# Altium PCB PCB1.PcbDoc (part 1 of 3)
Units mm, origin at the board's own origin, x right, y up, seen from the top; angles counter-clockwise.
Board outline 238 x 185 mm, 2 copper layers (Top Layer, Bottom Layer); 253 components, 247 nets, 920 pads, 36 vias.
Unrouted connection lines stored in the file: 56.
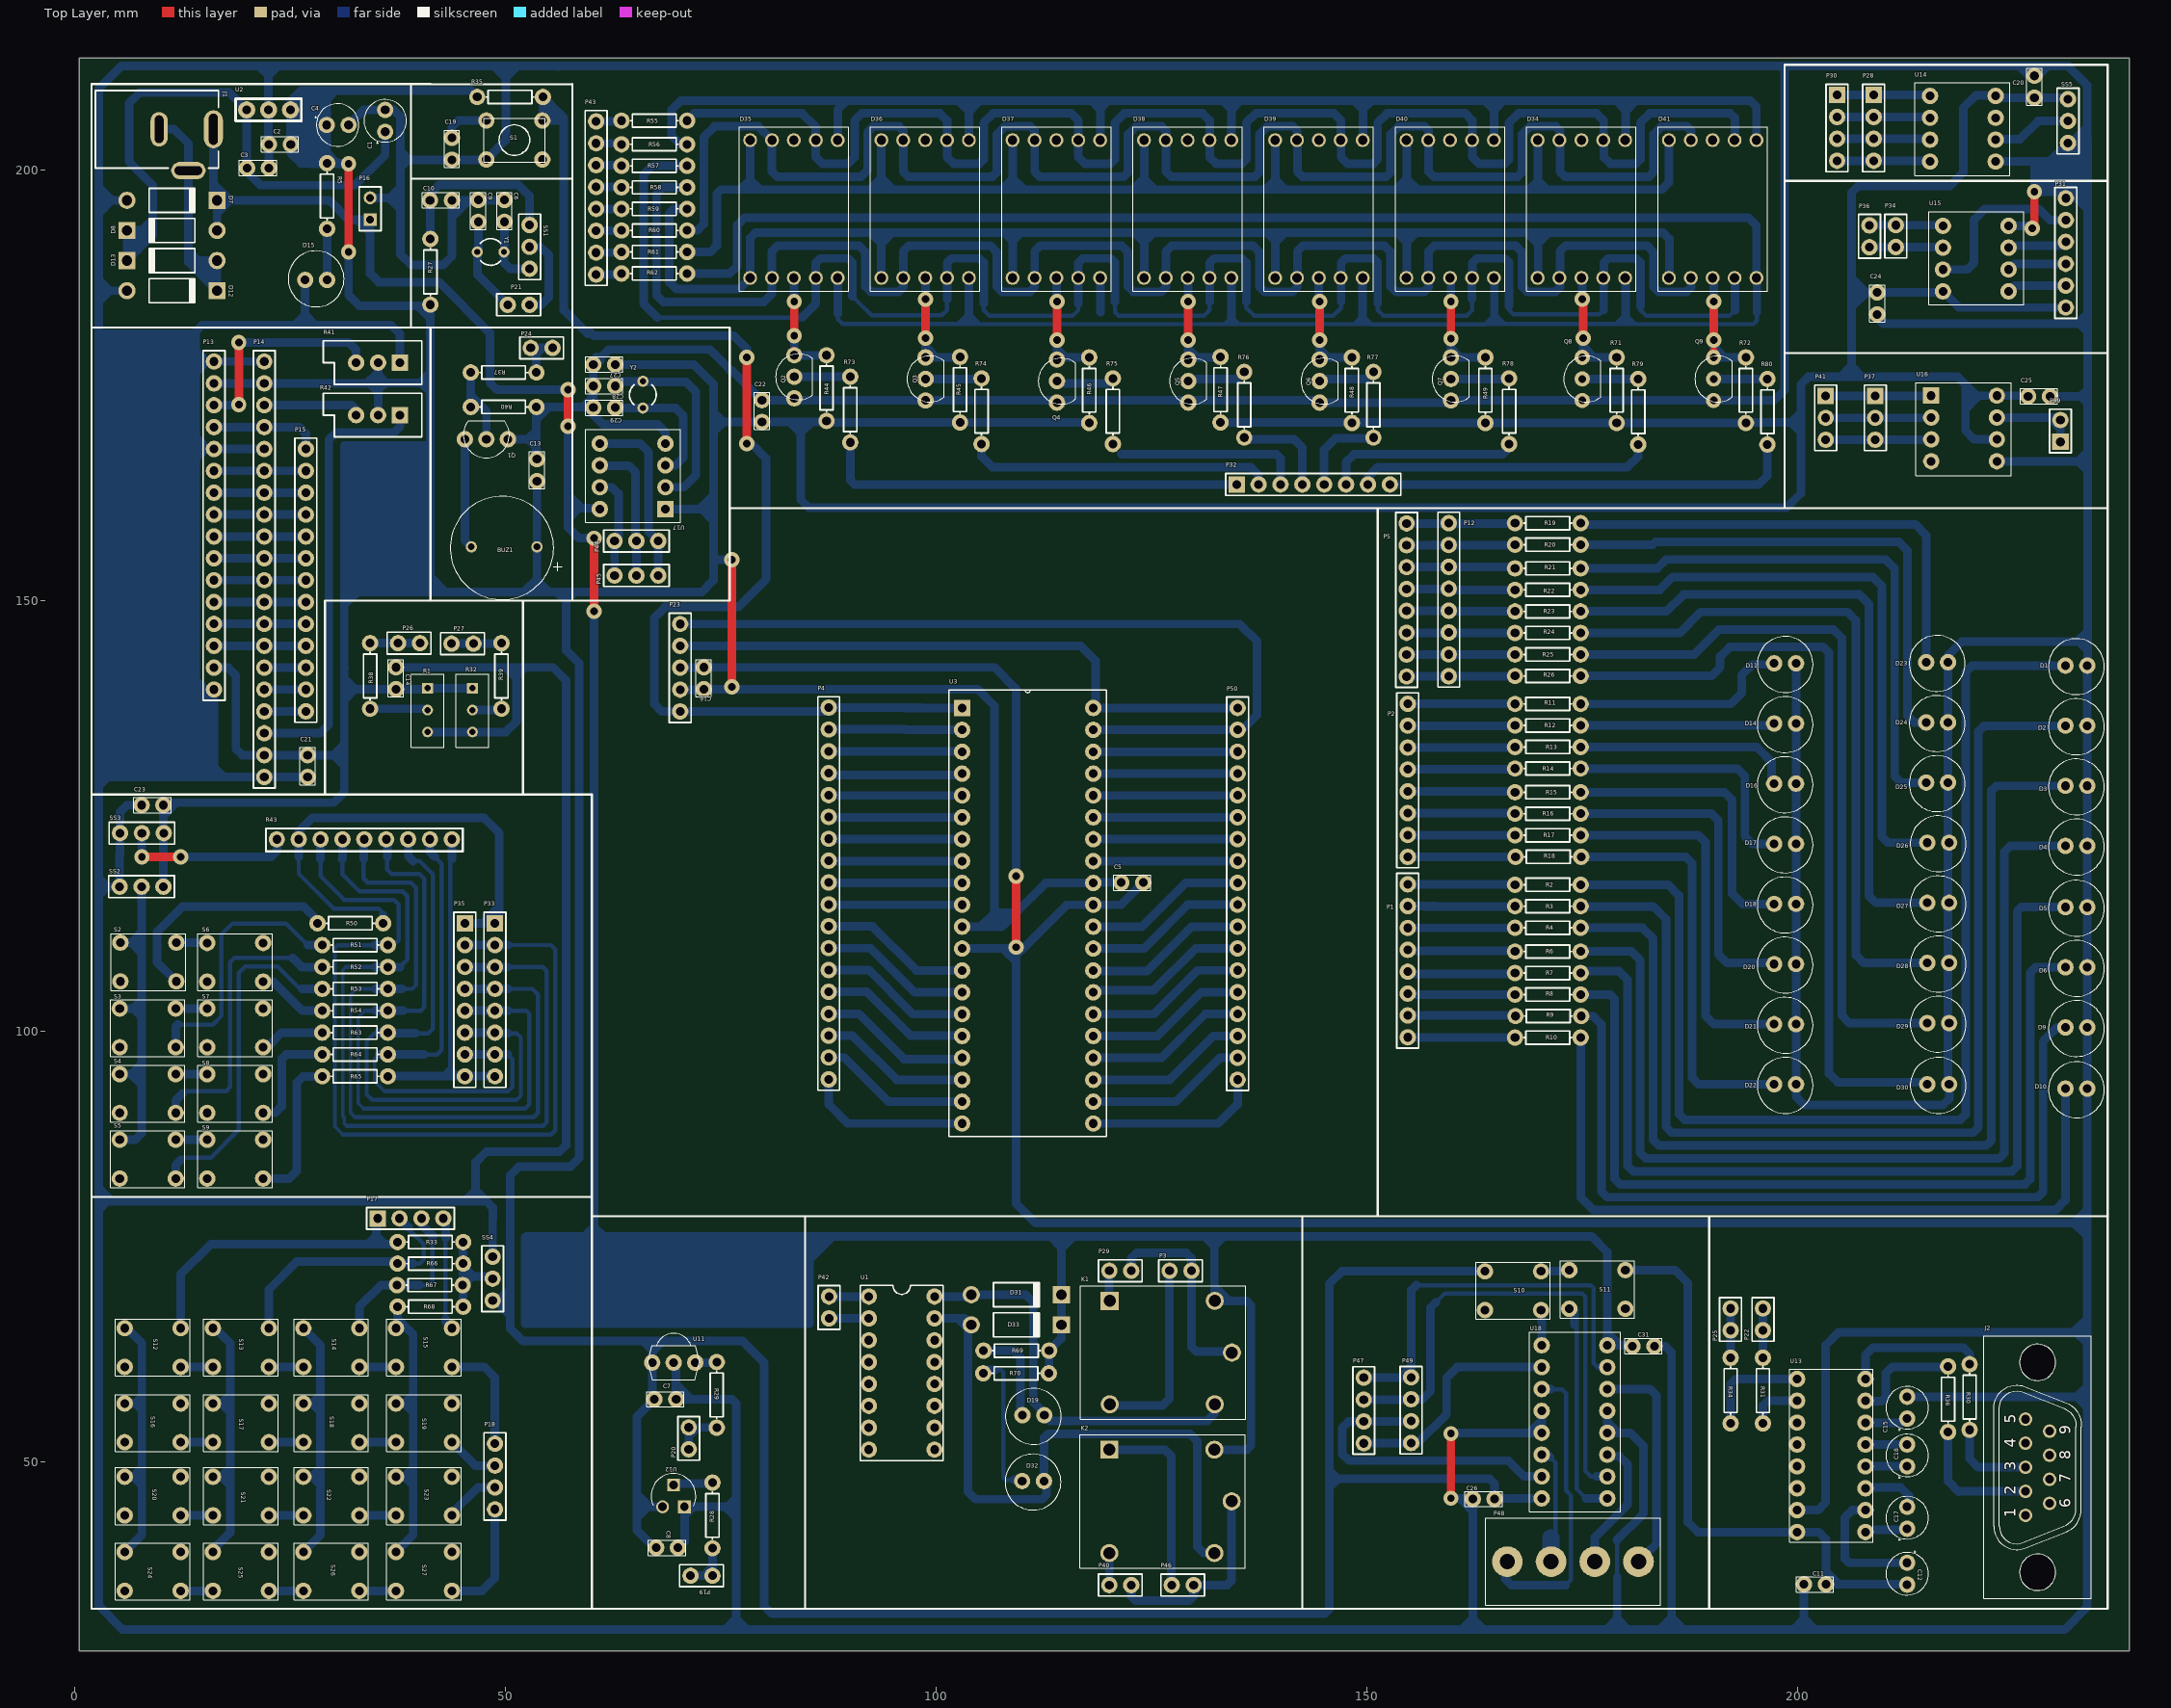
[diagram p0: Top Layer view]
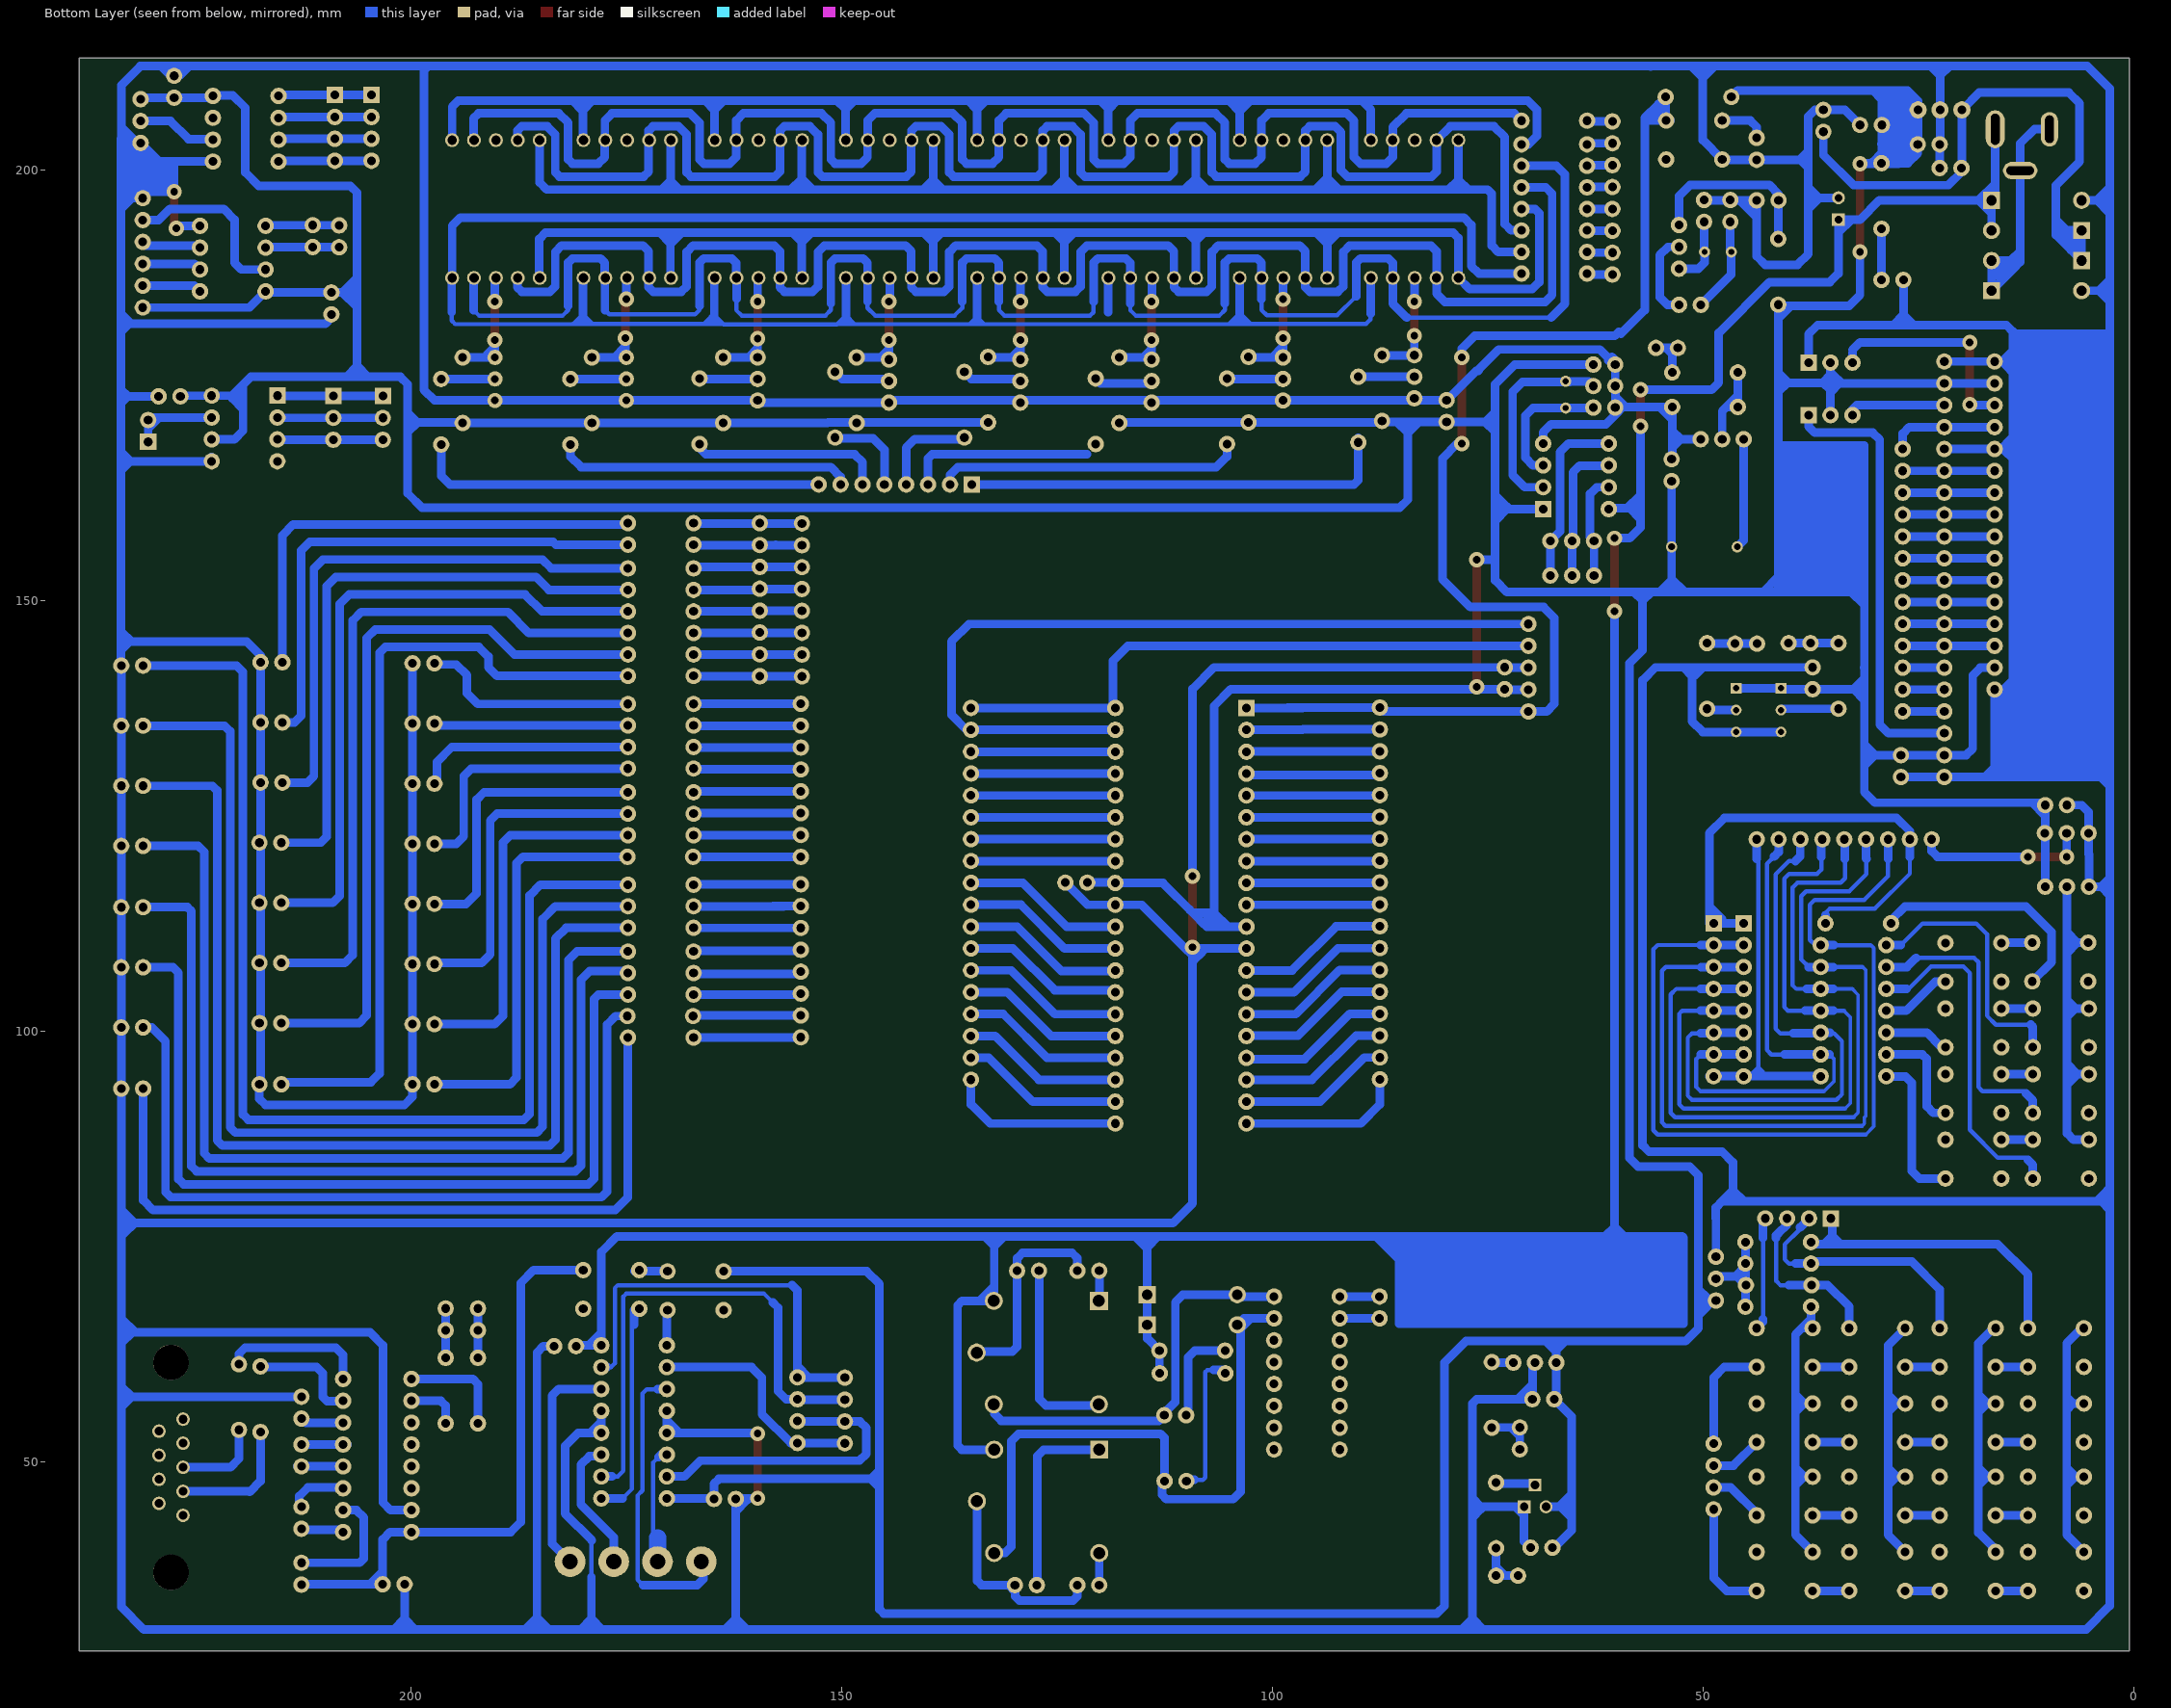
[diagram p1: Bottom Layer view, seen from below]

## Layer stack, top to bottom
Top Solder: solder mask 0.0102, Solder Resist, Dk 3.5
Top Layer: signal copper 0.0356
Dielectric 1: dielectric 0.32, FR-4, Dk 4.8
Bottom Layer: signal copper 0.0356
Bottom Solder: solder mask 0.0102, Solder Resist, Dk 3.5

## Board outline
0.5,28 238.5,28 238.5,213 0.5,213

## Design rules (kind name [scope] priority, off if disabled: settings)
Clearance [All] p1: gap=0.5 ignorepadtopadclearanceinfootprint=FALSE except(0.3: Arc-THPad Track-THPad)
PolygonConnect [All] p1: connectstyle=Relief reliefconductorwidth=0.254 reliefentries=4 polygonreliefangle="90 Angle" airgapwidth=0.254
RoutingVias [All] p1: holewidth=0.711 width=1.27 viastyle="Through Hole" minholewidth=0.711 minwidth=1.27 maxholewidth=0.711 maxwidth=1.27
SolderMaskExpansion [All] p1: expansion=0.102
Width [All] p1: maxlimit=2 minlimit=0.254 preferedwidth=1
30 further rules are at their usual default settings.

## Classes and differential pairs
component class Sheet1: BUZ1 C1 C2 C3 C4 C5 C6 C7 C8 C9 C10 C11 C12 C13 C14 C15 C16 C17 C18 C19 D1 D2 D3 D4 D5 D6 D7 D8 D9 D10 D11 D12 D13 D14 D15 D16 D17 D18 D19 D20 D21 D22 D23 D24 D25 D26 D27 D28 D29 D30 D31 D32 D33 J1 J2 K1 K2 P1 P2 P3 P4 P5 P12 P16 P19 P20 P21 P22 P23 P24 P25 P26 P27 P29 P40 P42 P46 P50 Q1 R1 R2 R3 R4 R5 R6 R7 R8 R9 R10 R11 R12 R13 R14 R15 R16 R17 R18 R19 R20 R21 R22 R23 R24 R25 R26 R27 R28 R29 R30 R31 R32 R34 R35 R36 R37 R38 R39 R40 R69 R70 S1 SS1 U1 U2 U3 U11 U12 U13 Y1
component class Sheet2: C20 C21 C22 C23 C24 C25 C26 C27 C28 C29 C31 D34 D35 D36 D37 D38 D39 D40 D41 P13 P14 P15 P17 P18 P28 P30 P31 P32 P33 P34 P35 P36 P37 P39 P41 P43 P44 P45 P47 P48 P49 Q2 Q4 Q5 Q6 Q7 Q8 Q9 R33 R41 R42 R43 R44 R45 R46 R47 R48 R49 R50 R51 R52 R53 R54 R55 R56 R57 R58 R59 R60 R61 R62 R63 R64 R65 R66 R67 R68 R71 R72 R73 R74 R75 R76 R77 R78 R79 R80 S2 S3 S4 S5 S6 S7 S8 S9 S10 S11 S12 S13 S14 S15 S16 S17 S18 S19 S20 S21 S22 S23 S24 S25 S26 S27 S? SS2 SS3 SS4 SS5 U14 U15 U16 U18 Y2

## Components (designator, comment, footprint, x,y, rotation, side; value= is the part's Value field where it differs from the comment)
BUZ1 "CEM-1203(42)" CUI_CEM-1203(42) 53.625,156.25 r180 top
C1 "P.CAP" polarityCAP 36,204.46 r90 top value=47U
C2 "cap" cap 22.5,203 r0 top value=104p
C3 "cap" cap 22.5,200.25 r180 top value=104p
C4 "P.CAP" polarityCAP 29.21,205.25 r0 top value=47U
C5 "cap" cap 124.016,117.25 r180 top value=104p
C6 "cap" cap 49.853,194 r90 top value=22p
C7 "cap" cap 69.79,57.25 r180 top value=104p
C8 "cap" cap 67.46,40 r0 top value=104p
C9 "cap" cap 46.805,194 r90 top value=22p
C10 "cap" cap 43.75,196.5 r180 top value=22p
C11 "cap" cap 200.75,35.75 r0 top value=104p
C12 "P.CAP" polarityCAP 212.727,38.25 r270 top value=10U
C13 "cap" cap 53.625,166.425 r270 top value=104p
C14 "cap" cap 37.25,142.25 r270 top value=104p
C15 "P.CAP" polarityCAP 212.727,55 r90 top value=10U
C16 "cap" cap 73,142.25 r270 top value=104p
C17 "P.CAP" polarityCAP 212.727,42.21 r90 top value=10U
C18 "P.CAP" polarityCAP 212.727,49.445 r90 top value=10U
C19 "cap" cap 43.75,201.21 r90 top value=0.1u
C20 "cap" cap 227.5,210.955 r270 top value=104p
C21 "cap" cap 27,129.516 r90 top value=104p
C22 "cap" cap 79.75,173.29 r270 top value=104p
C23 "cap" cap 7.71,126.25 r0 top value=104p
C24 "cap" cap 209.25,183.25 r90 top value=104p
C25 "cap" cap 229.312,173.728 r180 top value=104p
C26 "cap" cap 164.826,45.665 r180 top value=104p
C27 "cap" cap 60.173,177.423 r0 top value=104p
C28 "cap" cap 62.713,174.923 r180 top value=22p
C29 "cap" cap 62.713,172.423 r180 top value=22p
C31 "cap" cap 183.374,63.415 r180 top value=104p
D1 "LED" PCBComponent_1 231.107,142.463 r0 top
D2 "LED" PCBComponent_1 231.107,135.478 r0 top
D3 "LED" PCBComponent_1 231.107,128.493 r0 top
D4 "LED" PCBComponent_1 231.107,121.508 r0 top
D5 "LED" PCBComponent_1 231.107,114.396 r0 top
D6 "LED" PCBComponent_1 231.107,107.411 r0 top
D7 "1N4007" DO-41 11.25,196.5 r0 top
D8 "1N4007" DO-41 11.25,193 r180 top
D9 "LED" PCBComponent_1 231.107,100.426 r0 top
D10 "LED" PCBComponent_1 231.107,93.314 r0 top
D11 "LED" PCBComponent_1 197.281,142.717 r0 top
D12 "1N4007" DO-41 11.25,186 r0 top
D13 "1N4007" DO-41 11.25,189.5 r180 top
D14 "LED" PCBComponent_1 197.281,135.732 r0 top
D15 "LED" PCBComponent_1 29.25,187.25 r180 top
D16 "LED" PCBComponent_1 197.281,128.747 r0 top
D17 "LED" PCBComponent_1 197.281,121.762 r0 top
D18 "LED" PCBComponent_1 197.281,114.777 r0 top
D19 "LED" PCBComponent_1 109.996,55.389 r0 top
D20 "LED" PCBComponent_1 197.281,107.792 r0 top
D21 "LED" PCBComponent_1 197.281,100.807 r0 top
D22 "LED" PCBComponent_1 197.281,93.822 r0 top
D23 "LED" PCBComponent_1 214.934,142.844 r0 top
D24 "LED" PCBComponent_1 214.934,135.859 r0 top
D25 "LED" PCBComponent_1 214.934,128.874 r0 top
D26 "LED" PCBComponent_1 215.061,121.889 r0 top
D27 "LED" PCBComponent_1 215.061,114.904 r0 top
D28 "LED" PCBComponent_1 215.061,107.919 r0 top
D29 "LED" PCBComponent_1 215.061,100.934 r0 top
D30 "LED" PCBComponent_1 215.061,93.822 r0 top
D31 "Diode 1N4007" DO-41 109.286,69.389 r0 top
D32 "LED" PCBComponent_1 109.96,47.75 r0 top
D33 "Diode 1N4007" DO-41 109.286,65.889 r0 top
D34 "7seg" LED_LTD-4708G 169.819,187.485 r90 top
D35 "7seg" LED_LTD-4708G 78.379,187.485 r90 top
D36 "7seg" LED_LTD-4708G 93.619,187.485 r90 top
D37 "7seg" LED_LTD-4708G 108.859,187.485 r90 top
D38 "7seg" LED_LTD-4708G 124.099,187.485 r90 top
D39 "7seg" LED_LTD-4708G 139.339,187.485 r90 top
D40 "7seg" LED_LTD-4708G 154.579,187.485 r90 top
D41 "7seg" LED_LTD-4708G 185.062,187.485 r90 top
J1 "Socket" GCT_DCJ235-05-A-XX-X_REVA 9.5,204.75 r270 top
J2 "DB9M" D-09M 227.874,49.338 r90 top
K1 "1-1721150-0" RELAY_ORWH-SH-105D1F,000 126.324,62.665 r0 top
K2 "1-1721150-0" RELAY_ORWH-SH-105D1F,000 126.286,45.389 r0 top
P1 "Header 8" HDR1X8#1 154.736,99.283 r90 top
P2 "Header 8" HDR1X8#1 154.736,120.238 r90 top
P3 "Header 2" HDR1X2#1 127.084,72.165 r0 top
P4 "Header 18" HDR1X18#1 87.5,137.58 r270 top
P5 "Header 8" HDR1X8#1 154.609,141.193 r90 top
P12 "Header 8" HDR1X8#1 159.5,141.22 r90 top
P13 "Header 16" HDR1X16 16.121,177.776 r270 top
P14 "Header 20" HDR1X20 21.963,177.776 r270 top
P15 "Header 13" HDR1X13 26.789,167.616 r270 top
P16 "Header 2" HDR1X2#2 34.25,194.25 r90 top
P17 "Header 4" HDR1X4#1 35.13,78.25 r0 top
P18 "Header 4" HDR1X4#2 48.75,52.08 r270 top
P19 "Header 2" HDR1X2#3 71.46,36.75 r0 top
P20 "Header 2" HDR1X2#1 71.25,51.433 r90 top
P21 "Header 2" HDR1X2#1 52.77,184.364 r180 top
P22 "Header 2" HDR1X2#1 195.977,65.25 r90 top
P23 "Header 5" HDR1X5 70.25,147.29 r270 top
P24 "Header 2" HDR1X2#1 52.897,179.353 r0 top
P25 "Header 2" HDR1X2#1 192.227,65.25 r90 top
P26 "Header 2" HDR1X2#1 37.5,145.06 r0 top
P27 "Header 2" HDR1X2#1 43.71,145 r0 top
P28 "Header 4" HDR1X4#1 208.841,208.719 r270 top
P29 "Header 2" HDR1X2#1 120.084,72.165 r0 top
P30 "Header 4" HDR1X4#1 204.591,208.719 r270 top
P31 "Header 6" HDR1X6 231.147,184.045 r90 top
P32 "Header 8" HDR1X8#2 134.88,163.5 r0 top
P33 "Header 8" HDR1X8#2 48.75,112.53 r270 top
P34 "Header 2" HDR1X2#1 211.409,191.071 r90 top
P35 "Header 8" HDR1X8#2 45.25,112.53 r270 top
P36 "Header 2" HDR1X2#1 208.353,191.045 r90 top
P37 "Header 3" HDR1X3#1 209.022,173.768 r270 top
P39 "Header 2" HDR1X2#4 230.522,168.438 r90 top
P40 "Header 2" HDR1X2#1 120.086,35.665 r0 top
P41 "Header 3" HDR1X3#1 203.272,173.768 r270 top
P42 "Header 2" HDR1X2#1 87.536,69.179 r270 top
P43 "Header 8" HDR1X8#1 60.5,187.88 r90 top
P44 "Header 3" HDR1X3#2 67.713,156.923 r180 top
P45 "Header 3" HDR1X3#2 67.713,152.923 r180 top
P46 "Header 2" HDR1X2#1 127.334,35.665 r0 top
P47 "Header 4" HDR1X4#2 149.624,59.745 r270 top
P48 "screw terminal" "screw library" 166.296,38.389 r0 top
P49 "Header 4" HDR1X4#2 155.124,59.785 r270 top
P50 "Header 18" HDR1X18#2 134.976,137.54 r270 top
Q1 "2N5172" TRANSISTOR_TO-92#1 47.75,168.75 r180 top
Q2 "2N5172" TRANSISTOR_TO-92#1 83.5,176 r90 top
Q3 "2N5172" TRANSISTOR_TO-92#1 98.75,175.75 r90 top
Q4 "2N5172" TRANSISTOR_TO-92#1 114,175.5 r90 top
Q5 "2N5172" TRANSISTOR_TO-92#1 129.25,175.5 r90 top
Q6 "2N5172" TRANSISTOR_TO-92#1 144.5,175.5 r90 top
Q7 "2N5172" TRANSISTOR_TO-92#1 159.75,175.75 r90 top
Q8 "2N5172" TRANSISTOR_TO-92#2 175,175.75 r90 top
Q9 "2N5172" TRANSISTOR_TO-92#2 190.25,175.75 r90 top
R1 "3296W-1-103ALF" TRIM_3296W-1-103ALF 40.925,137.29 r0 top
R2 "Res1" AXIAL-0.3 171,117 r0 top value=470
R3 "Res1" AXIAL-0.3 171,114.5 r0 top value=470
R4 "Res1" AXIAL-0.3 171,112 r0 top value=470
R5 "Res1" AXIAL-0.3 29.25,197 r90 top value=2.2K
R6 "Res1" AXIAL-0.3 171,109.25 r0 top value=470
R7 "Res1" AXIAL-0.3 171,106.75 r0 top value=470
R8 "Res1" AXIAL-0.3 171,104.25 r0 top value=470
R9 "Res1" AXIAL-0.3 171.06,101.75 r0 top value=470
R10 "Res1" AXIAL-0.3 171,99.25 r0 top value=470
R11 "Res1" AXIAL-0.3 171,138 r0 top value=470
R12 "Res1" AXIAL-0.3 171,135.5 r0 top value=470
R13 "Res1" AXIAL-0.3 171,133 r0 top value=470
R14 "Res1" AXIAL-0.3 171,130.5 r0 top value=470
R15 "Res1" AXIAL-0.3 171,127.75 r0 top value=470
R16 "Res1" AXIAL-0.3 171,125.25 r0 top value=470
R17 "Res1" AXIAL-0.3 171,122.75 r0 top value=470
R18 "Res1" AXIAL-0.3 171.06,120.25 r0 top value=470
R19 "Res1" AXIAL-0.3 171,159 r0 top value=470
R20 "Res1" AXIAL-0.3 171,156.5 r0 top value=470
R21 "Res1" AXIAL-0.3 171,153.75 r0 top value=470
R22 "Res1" AXIAL-0.3 171,151.25 r0 top value=470
R23 "Res1" AXIAL-0.3 171,148.75 r0 top value=470
R24 "Res1" AXIAL-0.3 171,146.25 r0 top value=470
R25 "Res1" AXIAL-0.3 171,143.75 r0 top value=470
R26 "Res1" AXIAL-0.3 171,141.25 r0 top value=470
R27 "Res1" AXIAL-0.3 41.25,188.19 r270 top value=4.7K
R28 "Res1" AXIAL-0.3 74,43.75 r90 top value=470
R29 "Res1" AXIAL-0.3 74.5,57.75 r270 top value=470
R30 "Res1" AXIAL-0.3 219.977,57.5 r90 top value=470
R31 "Res1" AXIAL-0.3 195.977,58.25 r270 top value=470
R32 "3296W-1-103ALF" TRIM_3296W-1-103ALF 46.132,137.29 r0 top
R33 "Res1" AXIAL-0.3 41.25,75.5 r0 top value=1K
R34 "Res1" AXIAL-0.3 192.227,58.25 r90 top value=1K
R35 "Res1" AXIAL-0.3 50.5,208.5 r180 top value=10K
R36 "Res1" AXIAL-0.3 217.477,57.25 r270 top value=1K
R37 "Res1" AXIAL-0.3 49.75,176.5 r0 top value=10K
R38 "Res1" AXIAL-0.3 34.25,141.25 r270 top value=4.7K
R39 "Res1" AXIAL-0.3 49.5,141.25 r270 top value=4.7K
R40 "Res1" AXIAL-0.3 49.75,172.5 r180 top value=10K
R41 "RPot" VR5 35.171,177.649 r180 top value=1K
R42 "RPot" VR5 35.171,171.553 r180 top value=10K
R43 "10k sip" "10k sip" 23.42,122.28 r0 top value=10k*8
R44 "Res1" AXIAL-0.3 87.25,174.69 r270 top value=10k
R45 "Res1" AXIAL-0.3 102.75,174.5 r270 top value=10k
R46 "Res1" AXIAL-0.3 117.75,174.44 r270 top value=10k
R47 "Res1" AXIAL-0.3 133,174.5 r270 top value=10k
R48 "Res1" AXIAL-0.3 148.25,174.44 r270 top value=10k
R49 "Res1" AXIAL-0.3 163.75,174.44 r270 top value=10k
R50 "Res1" AXIAL-0.3 31.956,112.53 r0 top value=1K
R51 "Res1" AXIAL-0.3 32.5,109.99 r0 top value=1K
R52 "Res1" AXIAL-0.3 32.5,107.45 r0 top value=1K
R53 "Res1" AXIAL-0.3 32.5,104.91 r0 top value=1K
R54 "Res1" AXIAL-0.3 32.5,102.37 r0 top value=1K
R55 "Res1" AXIAL-0.3 67.25,205.75 r0 top value=470
R56 "Res1" AXIAL-0.3 67.25,203 r0 top value=470
R57 "Res1" AXIAL-0.3 67.25,200.5 r0 top value=470
R58 "Res1" AXIAL-0.3 67.25,198 r0 top value=470
R59 "Res1" AXIAL-0.3 67.25,195.5 r0 top value=470
R60 "Res1" AXIAL-0.3 67.25,193 r0 top value=470
R61 "Res1" AXIAL-0.3 67.25,190.5 r0 top value=470
R62 "Res1" AXIAL-0.3 67.25,188 r0 top value=470
R63 "Res1" AXIAL-0.3 32.5,99.83 r0 top value=1K
R64 "Res1" AXIAL-0.3 32.5,97.29 r0 top value=1K
R65 "Res1" AXIAL-0.3 32.5,94.75 r0 top value=1K
R66 "Res1" AXIAL-0.3 41.25,73 r0 top value=1K
R67 "Res1" AXIAL-0.3 41.19,70.5 r0 top value=1K
R68 "Res1" AXIAL-0.3 41.25,68 r0 top value=1K
R69 "Res1" AXIAL-0.3 109.286,62.889 r180 top value=470K
R70 "Res1" AXIAL-0.3 109.25,60.25 r180 top value=470K
R71 "Res1" AXIAL-0.3 179,174.44 r270 top value=10k
R72 "Res1" AXIAL-0.3 194,174.44 r270 top value=10k
R73 "Res1" AXIAL-0.3 90,172.19 r270 top value=1K
R74 "Res1" AXIAL-0.3 105.25,172 r270 top value=1K
R75 "Res1" AXIAL-0.3 120.5,172 r270 top value=1K
R76 "Res1" AXIAL-0.3 135.75,172.75 r270 top value=1K
R77 "Res1" AXIAL-0.3 150.75,172.75 r270 top value=1K
R78 "Res1" AXIAL-0.3 166.5,172 r270 top value=1K
R79 "Res1" AXIAL-0.3 181.5,171.94 r270 top value=1K
R80 "Res1" AXIAL-0.3 196.5,171.94 r270 top value=1K
S1 "SKHHANA010" SW_SKHHANA010 51,203.5 r180 top
S2 "SKHHANA010" buttons 5.325,110.316 r0 top
S3 "SKHHANA010" buttons 5.25,102.66 r0 top
S4 "SKHHANA010" buttons 5.25,95.04 r0 top
S5 "SKHHANA010" buttons 5.25,87.42 r0 top
S6 "SKHHANA010" buttons 15.41,110.28 r0 top
S7 "SKHHANA010" buttons 15.41,102.66 r0 top
S8 "SKHHANA010" buttons 15.41,95.04 r0 top
S9 "SKHHANA010" buttons 15.41,87.42 r0 top
S10 "SKHHANA010" buttons 163.786,72.139 r0 top
S11 "SKHHANA010" buttons 173.575,72.286 r0 top
S12 "SKHHANA010" buttons 5.825,65.536 r0 top
S13 "SKHHANA010" buttons 16.075,65.536 r0 top
S14 "SKHHANA010" buttons 26.575,65.536 r0 top
S15 "SKHHANA010" buttons 37.325,65.536 r0 top
S16 "SKHHANA010" buttons 5.825,56.786 r0 top
S17 "SKHHANA010" buttons 16.075,56.786 r0 top
S18 "SKHHANA010" buttons 26.575,56.786 r0 top
S19 "SKHHANA010" buttons 37.325,56.786 r0 top
S20 "SKHHANA010" buttons 5.825,48.286 r0 top
S21 "SKHHANA010" buttons 16.075,48.286 r0 top
S22 "SKHHANA010" buttons 26.575,48.286 r0 top
S23 "SKHHANA010" buttons 37.325,48.286 r0 top
S24 "SKHHANA010" buttons 5.825,39.536 r0 top
S25 "SKHHANA010" buttons 16.075,39.536 r0 top
S26 "SKHHANA010" buttons 26.575,39.536 r0 top
S27 "SKHHANA010" buttons 37.325,39.536 r0 top
SS1 "Header 3" HDR1X3#2 52.77,188.555 r90 top
SS2 "Header 3" HDR1X3#2 10.25,116.78 r180 top
SS3 "Header 3" HDR1X3#2 10.29,123 r180 top
SS4 "Header 3" HDR1X3#2 48.48,68.71 r90 top
SS5 "Header 3" HDR1X3#2 231.397,208.245 r270 top
U1 "ULN2004A" ULN2004A 95.976,60.289 r270 top
U2 "LM7805" LM7805 19.92,207 r0 top
U3 "PIC16F887" PIC(40pin) 102.986,137.53 r0 top
U11 "1838V" TSOP18XX 69.5,61.473 r180 top
U12 "LM35" TO127P254X495-3P 70.75,47.29 r0 top
U13 "MAX232" DIP794W45P254L1969H508Q16 203.916,50.715 r180 top
U14 "93LC46A/P" PIC10F220#1 215.38,208.62 r0 top
U15 "24AA1025" PIC10F220#1 224.5,185.92 r180 top
U16 "TLC5615" PIC10F220#2 215.522,173.808 r0 top
U17 "DS1302" PIC10F220#2 68.543,160.633 r180 top
U18 "L293D" L293D 170.286,63.509 r0 top
Y1 "XTAL" R38 48.25,190.5 r270 top value=20MHz
Y2 "XTAL" R38 65.923,173.923 r0 top value=32.768MHz

## Footprints (in the part's own frame and the unit in brackets; to place one, negate y for a bottom-side part, rotate by r counter-clockwise, add the part's x,y. Pads: shape width x height; smd on the part's side, far side on the other; paste and mask are expansions set on the pad)
"10k sip" [mil]
  round 75 hole 40: 1(0,0) 2(100,0) 3(200,0) 4(300,0) 5(400,0) 6(500,0) 7(600,0) 8(700,0) 9(800,0)
  silkscreen extent -50,-55 850,50
AXIAL-0.3 [mil] "Axial Device, Thru-Hole; 2 Leads; 0.3 in Pin Spacing"
  round 75 hole 40: 1(-150,0) 2(150,0)
  silkscreen extent -109,-30 109,30
buttons [mm]
  round 1.905 hole 1.016: 1(-0.075,-0.036) 2(6.425,-0.036) 3(-0.075,-4.536) 4(6.425,-4.536)
  silkscreen extent -1.14,-5.59 7.49,1.02
cap [mil]
  round 75 hole 40: 1(0,0) 2(100,0)
  silkscreen extent -35,-35 135,35
CUI_CEM-1203(42) [mm]
  round 1.308 hole 0.8: N(7.62,0) P(0,0)
  silkscreen extent -2.92,-5.87 10.06,6.13
D-09M [mil]
  round 62 hole 40: 1(-220,55) 2(-110,55) 3(0,55) 4(110,55) 5(220,55) 6(-165,-55) 7(-55,-55) 8(55,-55) 9(165,-55)
  round 162 hole 162 unplated: ""(-480,0) ""(480,0)
  silkscreen extent -600,-245 600,245
DIP794W45P254L1969H508Q16 [mm]
  round 1.905 hole 1.016: 1(-3.97,8.89) 2(-3.97,6.35) 3(-3.97,3.81) 4(-3.97,1.27) 5(-3.97,-1.27) 6(-3.97,-3.81) 7(-3.97,-6.35) 8(-3.97,-8.89) 9(3.97,-8.89) 10(3.97,-6.35) 11(3.97,-3.81) 12(3.97,-1.27) 13(3.97,1.27) 14(3.97,3.81) 15(3.97,6.35) 16(3.97,8.89)
  silkscreen extent -4.83,-10.03 4.83,10.03
DO-41 [mm] "Diode, Axial; Body 5.2 x 2.7 mm (LxDia. max), Lead Dia. 0.86 mm (max)"
  round 2 hole 1.2: 1(-5.23,0)
  rect 2x2 hole 1.2: 2(5.23,0)
  silkscreen extent -2.65,-1.4 2.75,1.4
GCT_DCJ235-05-A-XX-X_REVA [mm]
  oval 4.4x2.2 hole 1 slot 3.6 at 0 deg: 1(0,6.55)
  oval 4x2 hole 1 slot 3.2 at 0 deg: 2(0,0.25)
  oval 2x4 hole 1 slot 3.2 at 90 deg: 3(4.8,3.65)
  silkscreen extent -4.5,-7.15 4.5,7.15
HDR1X2#1 [mil] "Connector; Header; 2 Position"
  round 75 hole 40: 1(0,0) 2(100,0)
  silkscreen extent -50,-50 150,50
HDR1X2#2 [mil] "Connector; Header; 2 Position"
  rect 59.06x59.06 hole 35.43: 1(0,0)
  round 59.06 hole 35.43: 2(100,0)
  silkscreen extent -50,-50 150,50
HDR1X2#3 [mil] "Connector; Header; 2 Position"
  round 75 hole 40: 1(0,0) 1(100,0)
  silkscreen extent -50,-50 150,50
HDR1X2#4 [mil] "Connector; Header; 2 Position"
  rect 75x75 hole 40: 1(0,0)
  round 75 hole 40: 2(100,0)
  silkscreen extent -50,-50 150,50
HDR1X3#1 [mil] "Connector; Header; 3 Position"
  rect 75x75 hole 40: 1(0,0)
  round 75 hole 40: 2(100,0) 3(200,0)
  silkscreen extent -50,-50 250,50
HDR1X3#2 [mil] "Connector; Header; 3 Position"
  round 75 hole 40: 1(0,0) 2(100,0) 3(200,0)
  silkscreen extent -50,-50 250,50
HDR1X4#1 [mil] "Connector; Header; 4 Position"
  rect 75x75 hole 40: 1(0,0)
  round 75 hole 40: 2(100,0) 3(200,0) 4(300,0)
  silkscreen extent -50,-50 350,50
HDR1X4#2 [mil] "Connector; Header; 4 Position"
  round 75 hole 40: 1(0,0) 2(100,0) 3(200,0) 4(300,0)
  silkscreen extent -50,-50 350,50
HDR1X5 [mil] "Connector; Header; 5 Position"
  round 75 hole 40: 1(0,0) 2(100,0) 3(200,0) 4(300,0) 5(400,0)
  silkscreen extent -50,-50 450,50
HDR1X6 [mil] "Connector; Header; 6 Position"
  round 75 hole 40: 1(0,0) 2(100,0) 3(200,0) 4(300,0) 5(400,0) 6(500,0)
  silkscreen extent -50,-50 550,50
HDR1X8#1 [mil] "Connector; Header; 8 Position"
  round 75 hole 40: 1(0,0) 2(100,0) 3(200,0) 4(300,0) 5(400,0) 6(500,0) 7(600,0) 8(700,0)
  silkscreen extent -50,-50 750,50
HDR1X8#2 [mil] "Connector; Header; 8 Position"
  rect 75x75 hole 40: 1(0,0)
  round 75 hole 40: 2(100,0) 3(200,0) 4(300,0) 5(400,0) 6(500,0) 7(600,0) 8(700,0)
  silkscreen extent -50,-50 750,50
HDR1X13 [mil] "Connector; Header; 13 Position"
  round 75 hole 40: 1(0,0) 2(100,0) 3(200,0) 4(300,0) 5(400,0) 6(500,0) 7(600,0) 8(700,0) 9(800,0) 10(900,0) 11(1000,0) 12(1100,0) 13(1200,0)
  silkscreen extent -50,-50 1250,50
HDR1X16 [mil] "Connector; Header; 16 Position"
  round 75 hole 40: 1(0,0) 2(100,0) 3(200,0) 4(300,0) 5(400,0) 6(500,0) 7(600,0) 8(700,0) 9(800,0) 10(900,0) 11(1000,0) 12(1100,0) 13(1200,0) 14(1300,0) 15(1400,0) 16(1500,0)
  silkscreen extent -50,-50 1550,50
HDR1X18#1 [mil] "Connector; Header; 18 Position"
  round 75 hole 40: 1(0,0) 2(100,0) 3(200,0) 4(300,0) 5(400,0) 6(500,0) 7(600,0) 8(700,0) 9(800,0) 10(900,0) 11(1000,0) 12(1100,0) 13(1200,0) 14(1300,0) 15(1400,0) 16(1500,0) 17(1600,0) 18(1700,0)
  silkscreen extent -50,-50 1750,50
HDR1X18#2 [mil] "Connector; Header; 18 Position"
  round 75 hole 40: 1(1700,0) 2(1600,0) 3(1500,0) 4(1400,0) 5(1300,0) 6(1200,0) 7(1100,0) 8(1000,0) 9(900,0) 10(800,0) 11(700,0) 12(600,0) 13(500,0) 14(400,0) 15(300,0) 16(200,0) 17(100,0) 18(0,0)
  silkscreen extent -50,-50 1750,50
HDR1X20 [mil] "Connector; Header; 20 Position"
  round 75 hole 40: 1(0,0) 2(100,0) 3(200,0) 4(300,0) 5(400,0) 6(500,0) 7(600,0) 8(700,0) 9(800,0) 10(900,0) 11(1000,0) 12(1100,0) 13(1200,0) 14(1300,0) 15(1400,0) 16(1500,0) 17(1600,0) 18(1700,0) 19(1800,0) 20(1900,0)
  silkscreen extent -50,-50 1950,50
L293D [mil]
  round 75 hole 40: 1(0,0) 2(0,-100) 3(0,-200) 4(0,-300) 5(0,-400) 6(0,-500) 7(0,-600) 8(0,-700) 9(300,-700) 10(300,-600) 11(300,-500) 12(300,-400) 13(300,-300) 14(300,-200) 15(300,-100) 16(300,0)
  silkscreen extent -55,-760 360,60
LED_LTD-4708G [mm]
  round 1.62 hole 1.08: 1(0,0) 2(0,-2.54) 3(0,-5.08) 4(0,-7.62) 5(0,-10.16) 6(16,-10.16) 7(16,-7.62) 8(16,-5.08) 9(16,-2.54) 10(16,0)
  silkscreen extent -1.52,-11.43 17.53,1.27
LM7805 [mm]
  round 2 hole 1: 1(0,0) 2(2.54,0) 3(5.08,0)
  silkscreen extent -1.27,-1.27 6.35,1.27
PCBComponent_1 [mil]
  round 75 hole 40: 1(0,0) 2(100,0)
  silkscreen extent -78,-133 178,123
PIC10F220#1 [mil]
  round 75 hole 40: 1(0,0) 2(0,-100) 3(0,-200) 4(0,-300) 5(300,-300) 6(300,-200) 7(300,-100) 8(300,0)
  silkscreen extent -70,-365 365,60
PIC10F220#2 [mil]
  rect 75x75 hole 40: 1(0,0)
  round 75 hole 40: 2(0,-100) 3(0,-200) 4(0,-300) 5(300,-300) 6(300,-200) 7(300,-100) 8(300,0)
  silkscreen extent -70,-365 365,60
PIC(40pin) [mil]
  rect 75x75 hole 40: 1(0,0)
  round 75 hole 40: 2(0,-100) 3(0,-200) 4(0,-300) 5(0,-400) 6(0,-500) 7(0,-600) 8(0,-700) 9(0,-800) 10(0,-900) 11(0,-1000) 12(0,-1100) 13(0,-1200) 14(0,-1300) 15(0,-1400) 16(0,-1500) 17(0,-1600) 18(0,-1700) 19(0,-1800) 20(0,-1900) 21(600,-1900) 22(600,-1800) 23(600,-1700) 24(600,-1600) 25(600,-1500) 26(600,-1400) 27(600,-1300) 28(600,-1200) 29(600,-1100) 30(600,-1000) 31(600,-900) 32(600,-800) 33(600,-700) 34(600,-600) 35(600,-500) 36(600,-400) 37(600,-300) 38(600,-200) 39(600,-100) 40(600,0)
  silkscreen extent -60,-1960 660,82
polarityCAP [mil]
  round 75 hole 40: 1(0,0) 2(100,0)
  silkscreen extent -55,-97 147,97
R38 [mm] "Crystal, Thru-Hole; 2 Leads; Body 3.1 x 8.2 mm (Dia.xH)"
  round 1.3 hole 0.7: 1(0,1.55) 2(0,-1.55)
  silkscreen extent -1.55,-1.19 1.55,1.17
RELAY_ORWH-SH-105D1F,000 [mm]
  rect 2.1x2.1 hole 1.4: 1(-6.2,6)
  round 2.1 hole 1.4: 2(-6.2,-6) 3(6,6) 4(8,0) 5(6,-6)
  silkscreen extent -9.6,-7.75 9.6,7.75
"screw library" [mil]
  round 140 hole 70: 1(0,0) 2(200,0) 3(400,0) 4(600,0)
  silkscreen extent -100,-200 700,200
SW_SKHHANA010 [mil]
  round 75 hole 40: 1(-128,89) 2(128,89) 3(-128,-89) 4(128,-89)
  silkscreen extent -140,-100 140,100
TO127P254X495-3P [mil]
  round 59 hole 39: 1(-100,-100)
  rect 59x59 hole 39: 2(-50,0) 3(0,-100)
  silkscreen extent -153,-95 52,52
TRANSISTOR_TO-92#1 [mil]
  round 75 hole 40: 1(98.43,0) 2(0,0) 3(-98.43,0)
  silkscreen extent -105,-85 105,85
TRANSISTOR_TO-92#2 [mil]
  round 70 hole 35: 1(98.43,0) 2(0,0) 3(-98.43,0)
  silkscreen extent -105,-85 105,85
TRIM_3296W-1-103ALF [mm]
  rect 1.248x1.248 hole 0.74: 1(0,2.54)
  round 1.248 hole 0.74: 2(0,0) 3(0,-2.54)
  silkscreen extent -1.91,-4.32 1.91,4.19
TSOP18XX [mil]
  round 75 hole 40: GND(-0.05,-1.05) OUT(-98.47,-1.05) VCC(98.38,-1.05)
  silkscreen extent -118,-134 118,78
ULN2004A [mil]
  round 75 hole 40: 1(-350,-150) 2(-250,-150) 3(-150,-150) 4(-50,-150) 5(50,-150) 6(150,-150) 7(250,-150) 8(350,-150) 9(350,150) 10(250,150) 11(150,150) 12(50,150) 13(-50,150) 14(-150,150) 15(-250,150) 16(-350,150)
  silkscreen extent -400,-190 400,190
VR5 [mil] "Thru-Hole; 3 Leads"
  rect 75x75 hole 40: 1(-100,0)
  round 75 hole 40: 2(0,0) 3(100,0)
  silkscreen extent -200,-100 250,100

## Part data
BUZ1: "12 mm, 3.5 V, 85 dB, Through Hole, Magnetic Audio Transducer Buzzer", Package="TO-220 CUI Inc.", Availability=Unavailable, CUI_purchase_URL=https://www.cuidevices.com/product/audio/buzzers/audio-transducers/cem-1203_42_?utm_source=snapeda.com&utm_medium=referral&utm_campaign=snapedaBOM, MF="CUI Devices", MP=CEM-1203_42_, Price=None, SnapEDA_Link=https://www.snapeda.com/parts/CEM-1203%2842%29/CUI%20Devices/view-part/1320038/?ref=snap
C1 C4 C12 C15 C17 C18: library part CAP
D7 D8 D12 D13: library part "Diode 1N4007", "1 Amp General Purpose Rectifier", Code_JEDEC=DO-204-AL, ComponentLink1Description="Manufacturer Link", ComponentLink1URL=http://www.fairchildsemi.com/, ComponentLink2Description=Datasheet, ComponentLink2URL=http://www.fairchildsemi.com/ds/1N%2F1N4001.pdf, DatasheetVersion=1998, LatestRevisionDate=17-Jul-2002, LatestRevisionNote="Re-released for DXP Platform.", PackageDescription="Diode, Axial; Body 5.2 x 2.7 mm (LxDia. max), Lead Dia. 0.86 mm (max)", PackageReference=DO-41, PackageVersion=Aug-1999, Published=8-Jun-2000, Publisher="Altium Limited"
D31 D33: "1 Amp General Purpose Rectifier", Code_JEDEC=DO-204-AL, ComponentLink1Description="Manufacturer Link", ComponentLink1URL=http://www.fairchildsemi.com/, ComponentLink2Description=Datasheet, ComponentLink2URL=http://www.fairchildsemi.com/ds/1N%2F1N4001.pdf, DatasheetVersion=1998, LatestRevisionDate=17-Jul-2002, LatestRevisionNote="Re-released for DXP Platform.", PackageDescription="Diode, Axial; Body 5.2 x 2.7 mm (LxDia. max), Lead Dia. 0.86 mm (max)", PackageReference=DO-41, PackageVersion=Aug-1999, Published=8-Jun-2000, Publisher="Altium Limited"
J1: library part DCJ235-05-A-XX-X_REVA, "Dc Power Jack, 5a, 20vdc, Black", Package=None, Availability=Unavailable, MF="Global Connector Technology", MP=DCJ235-05-A-K1-A, Price=None, SnapEDA_Link=https://www.snapeda.com/parts/DCJ235-05-A-K1-A/Global%20Connector%20Technology/view-part/813042/?ref=snap
J2: "Adapter Connector D-Sub, 9 Pin Male To D-Sub, 9 Pin Male Free Hanging _In-Line_", Package=None, Availability=Unavailable, MF="NorComp Inc.", MP=DB9M, Price=None, SnapEDA_Link=https://www.snapeda.com/parts/DB9M/NorComp%20Inc./view-part/558713/?ref=snap
K1 K2: library part ORWH-SH-105D1F,000, "Electromechanical Relay 5VDC 15A SPDT __ 19.2mm 15.5mm 15mm__ THT General Purpose Relay", Package=None, Availability=Unavailable, MF="TE Connectivity", MP=ORWH-SH-105D1F,000, Price=None, SnapEDA_Link=https://www.snapeda.com/parts/ORWH-SH-105D1F%2C000/TE%20Connectivity%20Potter%20%26%20Brumfield%20Relays/view-part/573992/?ref=snap, TE_purchase_URL=https://www.te.com/usa-en/product-1-1721150-0.html?te_bu=Cor&te_type=disp&te_campaign=seda_glo_cor-seda-global-disp-prtnr-fy19-seda-model-bom-cta_sma-317_1&elqCampaignId=32493
P1 P2 P5 P12 P32 P33 P35 P43: "Header, 8-Pin", LatestRevisionDate=17-Jul-2002, LatestRevisionNote="Re-released for DXP Platform.", Publisher="Altium Limited"
P3 P16 P19 P20 P21 P22 P24 P25 P26 P27 P29 P34 P36 P39 P40 P42 P46: "Header, 2-Pin", LatestRevisionDate=17-Jul-2002, LatestRevisionNote="Re-released for DXP Platform.", Publisher="Altium Limited"
P4 P50: "Header, 18-Pin", LatestRevisionDate=17-Jul-2002, LatestRevisionNote="Re-released for DXP Platform.", Publisher="Altium Limited"
P13: "Header, 16-Pin", LatestRevisionDate=17-Jul-2002, LatestRevisionNote="Re-released for DXP Platform.", Publisher="Altium Limited"
P14: "Header, 20-Pin", LatestRevisionDate=17-Jul-2002, LatestRevisionNote="Re-released for DXP Platform.", Publisher="Altium Limited"
P15: "Header, 13-Pin", LatestRevisionDate=17-Jul-2002, LatestRevisionNote="Re-released for DXP Platform.", Publisher="Altium Limited"
P17 P18 P28 P30 P47 P49: "Header, 4-Pin", LatestRevisionDate=17-Jul-2002, LatestRevisionNote="Re-released for DXP Platform.", Publisher="Altium Limited"
P23: "Header, 5-Pin", LatestRevisionDate=17-Jul-2002, LatestRevisionNote="Re-released for DXP Platform.", Publisher="Altium Limited"
P31: "Header, 6-Pin", LatestRevisionDate=17-Jul-2002, LatestRevisionNote="Re-released for DXP Platform.", Publisher="Altium Limited"
P37 P41 P44 P45 SS1 SS2 SS3 SS4 SS5: "Header, 3-Pin", LatestRevisionDate=17-Jul-2002, LatestRevisionNote="Re-released for DXP Platform.", Publisher="Altium Limited"
Q1 Q2 Q3 Q4 Q5 Q6 Q7 Q8 Q9: "Bipolar (BJT) Transistor NPN 25V 500mA 625mW Through Hole TO-92-3", Package="TO-92 ON Semiconductor", Availability=Warning, DigiKey-Purchase-URL=https://snapeda.com/shop?store=DigiKey&id=2663226, MF="ON Semiconductor", MP=2N5172, Price=None, SnapEDA_Link=https://www.snapeda.com/parts/2N5172/ON%20Semiconductor/view-part/2663226/?ref=snap
R1 R32: "10 kOhms 0.5W, 1 / 2W PC Pins qua lỗ Trimmer Potentiometer Cermet 25 Turn Top Điều chỉnh", Package="1005 Bourns", Availability=Warning, MF=Bourns, Mouser-Purchase-URL=https://snapeda.com/shop?store=Mouser&id=697371, MP=3296W-1-103ALF, Price=None, SnapEDA_Link=https://www.snapeda.com/parts/3296W-1-103ALF/Bourns/view-part/697371/?ref=snap
R2 R3 R4 R5 R6 R7 R8 R9 R10 R11 R12 R13 R14 R15 R16 R17 R18 R19 R20 R21 R22 R23 R24 R25 R26 R27 R28 R29 R30 R31 R33 R34 R35 R36 R37 R38 R39 R40 R44 R45 R46 R47 R48 R49 R50 R51 R52 R53 R54 R55 R56 R57 R58 R59 R60 R61 R62 R63 R64 R65 R66 R67 R69 R70 R71 R72 R73 R74 R75 R76 R77 R78 R79 R80: "Resistor", LatestRevisionDate=17-Jul-2002, LatestRevisionNote="Re-released for DXP Platform.", PackageReference=AXIAL-0.3, Published=8-Jun-2000, Publisher="Altium Limited"
  R2 R3 R4 R5 R6 R7 R8 R9 R10 R11 R12 R13 R14 R15 R16 R17 R18 R19 R20 R21 R22 R23 R24 R25 R26 R27 R28 R29 R30 R31 R33 R34 R35 R36 R37 R38 R39 R40 R44 R45 R46 R47 R48 R49 R50 R51 R52 R53 R54 R56 R57 R58 R59 R60 R61 R62 R63 R64 R65 R66 R67 R69 R70 R71 R72 R73 R74 R75 R76 R77 R78 R79 R80: PackageDescription="Axial Device, Thru-Hole; 2 Leads; 0.3 in Pin Spacing"
  R55: PackageDescription=TH.HOLE
R41 R42: "Potentiometer", LatestRevisionDate=17-Jul-2002, LatestRevisionNote="Re-released for DXP Platform.", PackageDescription="Variable Resistor, Thru-Hole; 3 Leads", PackageReference=VR5, Published=8-Jun-2000, Publisher="Altium Limited", Set Position=0.5, Sim Note="Enter the Resistance value and the set point into parameter fields."
R68: "Resistor", Package=TH.HOLE, LatestRevisionDate=17-Jul-2002, LatestRevisionNote="Re-released for DXP Platform.", PackageDescription="Axial Device, Thru-Hole; 2 Leads; 0.3 in Pin Spacing", PackageReference=AXIAL-0.3, Published=8-Jun-2000, Publisher="Altium Limited"
S1 S2 S3 S4 S5 S6 S7 S8 S9 S10 S11 S12 S13 S14 S15 S16 S17 S18 S19 S20 S21 S22 S23 S24 S25 S26 S27: "Switch Tactile N.O. SPST Round Button PC Pins 0.05A 12VDC 0.98N Thru-Hole Bulk", Package=None, Availability=Unavailable, MF=ALPS, MP=SKHHANA010, Price=None, SnapEDA_Link=https://www.snapeda.com/parts/SKHHANA010/ALPS/view-part/248805/?ref=snap
U1: Package="DIP-16 STMicroelectronics", Availability=Unavailable, DigiKey-Purchase-URL=https://snapeda.com/shop?store=DigiKey&id=45236, MF=STMicroelectronics, MP=ULN2004A, Price=None, SnapEDA_Link=https://www.snapeda.com/parts/ULN2004A/STMicroelectronics/view-part/45236/?ref=snap
U2: library part Component_1
U3: library part PIC(40)pin
U11: "Remote Receiver Sensor, 38.0kHz 45m Through Hole", Package=None, Availability=Unavailable, MF=Vishay, MP=TSOP4838, Price=None, SnapEDA_Link=https://www.snapeda.com/parts/TSOP4838/Vishay%20Semiconductor%20Opto%20Division/view-part/702087/?ref=snap
U12: "&plusmn;0.5&deg;C 4V-30V, Temperature sensor with analog output 3-TO-92", Package="TO-92-3 Texas Instruments", Availability=Warning, MF="Texas Instruments", MP=LM35CZ/LFT1, Price=None, SnapEDA_Link=https://www.snapeda.com/parts/LM35CZ/LFT1/Texas%20Instruments/view-part/18854/?ref=snap, Texas_Instruments-Purchase-URL=https://snapeda.com/shop?store=Texas+Instruments&id=18854
U13: library part MAX232N, "Dual EIA-232 Driver/Receiver", Package="PDIP-16 Texas Instruments", Availability=Unavailable, DigiKey-Purchase-URL=https://snapeda.com/shop?store=DigiKey&id=552531, MF="Texas Instruments", Mouser-Purchase-URL=https://snapeda.com/shop?store=Mouser&id=552531, MP=MAX232N, Price=None, SnapEDA_Link=https://www.snapeda.com/parts/MAX232N/Texas%20Instruments/view-part/552531/?ref=snap
U14: "EEPROM Memory IC 1Kb (128 x 8) SPI 2MHz 8-PDIP", Package="DIP-8 Microchip", Availability=Good, Check_prices=https://www.snapeda.com/parts/93LC46A/P/Microchip/view-part/184688/?ref=eda, MF=Microchip, MP=93LC46A/P, Price=None, Purchase-URL=https://pricing.snapeda.com/search/part/93LC46A/P/?ref=eda, SnapEDA_Link=https://www.snapeda.com/parts/93LC46A/P/Microchip/view-part/184688/?ref=snap
U15: library part 24AA1025-I/P, "EEPROM Memory IC 1Mb (128K x 8) I²C 400kHz 900ns 8-PDIP", Package="DIP-8 Microchip", Availability=Warning, Check_prices=https://www.snapeda.com/parts/24AA1025-I/P/Microchip/view-part/1178/?ref=eda, MF=Microchip, MP=24AA1025-I/P, Price=None, Purchase-URL=https://pricing.snapeda.com/search/part/24AA1025-I/P/?ref=eda, SnapEDA_Link=https://www.snapeda.com/parts/24AA1025-I/P/Microchip/view-part/1178/?ref=snap
U16: library part TLC5615CP, "10-bit, single-channel, low-power DAC with 12.5us settling time and power-on reset 8-PDIP 0 to 70", Package="PDIP-8 Texas", Availability=Warning, Check_prices=https://www.snapeda.com/parts/TLC5615CP/Texas%20Instruments/view-part/480984/?ref=eda, MF="Texas Instruments", MP=TLC5615CP, Price=None, Purchase-URL=https://pricing.snapeda.com/search/part/TLC5615CP/?ref=eda, SnapEDA_Link=https://www.snapeda.com/parts/TLC5615CP/Texas%20Instruments/view-part/480984/?ref=snap
U17: "Real Time Clock _RTC_ IC Clock/Calendar 31B 8-DIP _0.300, 7.62mm_", Package="PDIP-8 Maxim", Digi-Key_Part_Number=DS1302+-ND, Digi-Key_Purchase_URL=https://www.digikey.co.id/product-detail/en/maxim-integrated/DS1302-/DS1302--ND/956878?utm_source=snapeda&utm_medium=aggregator&utm_campaign=symbol, MF="Maxim Integrated", MP=DS1302+, SnapEDA_Link=https://www.snapeda.com/parts/DS1302%2B/Maxim%20Integrated/view-part/211653/?ref=snap
Y1 Y2: "Crystal Oscillator", LatestRevisionDate=17-Jul-2002, LatestRevisionNote="Re-released for DXP Platform.", PackageDescription="Crystal, Thru-Hole; 2 Leads; Body 3.1 x 8.2 mm (Dia.xH)", PackageReference=R38, Published=8-Jun-2000, Publisher="Altium Limited"

## Via types
v1: diameter 1.778, hole 0.889, Top Layer to Bottom Layer, 36 vias

## Nets (pads, with @x,y where several pads share a name; then routed paths per layer and width w, separated by ;. In a path a pad name is that pad's centre, name@x,y a point inside that pad or via, vN(x,y) a via of type N, cw(c..) or ccw(c..) an arc to the next point about the centre after c; other vN are vias at no path point)
1C: Q2.2 R73.1 | length 6.5
  Bottom Layer w1: Q2.2@83.5,176 R73.1@90,176
1D: D35.3 Q2.1 R44.1 | length 12.4
  Top Layer w1: Q2.1@83.459,178.967 Q2.1@83.5,179.008 ; v1(83.5,180.75) v1(83.5,184.75)
  Bottom Layer w1: Q2.1@83.459,178.967 Q2.1@83.496,179.004 ; D35.3@83.459,187.485 83.459,185.041 83.5,185 v1(83.5,184.75) ; Q2.1@83.46,179.04 Q2.1@83.496,179.004 ; Q2.1@83.5,178.5 R44.1@87.25,178.5 ; Q2.1@83.5,179 Q2.1@83.496,179.004 ; v1(83.5,180.75) 83.5,179.008 Q2.1@83.496,179.004
2C: Q3.2 R74.1 | length 6.5
  Bottom Layer w1: Q3.2@98.75,175.75 105.19,175.75 R74.1@105.25,175.81
2D: D36.3 Q3.1 R45.1 | length 15.5
  Top Layer w1: v1(98.75,180.5) 98.75,180.75 98.699,180.801 98.75,180.852 v1(98.75,185)
  Bottom Layer w1: D36.3@98.699,187.485 98.75,187.434 98.5,187.184 D36.3@98.75,186.933 ; v1(98.75,180.5) 98.75,179.5 ; v1(98.75,185) D36.3@98.75,186.932 ; 100.25,178.25 100,178.25 ; R45.1@102.75,178.31 102.69,178.25 100,178.25 ; 98.75,179.5 100,178.25 ; 98.75,179.5 Q3.1@98.75,178.25 100,178.25
3C: Q4.2 R75.1 | length 6.9
  Bottom Layer w1: Q4.2@114,175.75 114.5,175.25 119.94,175.25 R75.1@120.5,175.81
3D: D37.3 Q4.1 R46.1 | length 15.3
  Top Layer w1: v1@114,180.5 v1(114,180.25) v1(114,184.75)
  Bottom Layer w1: D37.3@113.939,187.485 D37.3@113.939,187.311 ; Q4.1@114,178 Q4.1@114,178.25 ; v1(114,180.25) 114,179.25 ; v1(114,184.75) 113.939,184.811 D37.3@113.939,187.311 ; D37.3@114,187.25 D37.3@113.939,187.311 ; 115.25,178.25 115,178.25 ; R46.1@117.75,178.25 115,178.25 ; Q4.1@114,178.25 114,179.25 ; Q4.1@114,178.25 115,178.25 ; 114,179.25 115,178.25
4C: Q5.2 R76.1 | length 6.8
  Bottom Layer w1: Q5.2@129.25,175.75 134.94,175.75 R76.1@135.75,176.56
4D: D38.3 Q5.1 R47.1 | length 15.2
  Top Layer w1: v1(129.25,180.25) 129.25,184.25 129,184.5 v1(129.25,184.75)
  Bottom Layer w1: D38.3@129.179,187.485 129.194,187.5 129.25,187.5 v1(129.25,184.75) ; Q5.1@129.25,178 129.25,179.25 ; Q5.1@129.25,178.25 130.25,178.25 ; v1(129.25,180.25) 129.25,179.25 ; 130.5,178.25 130.25,178.25 ; R47.1@133,178.31 132.94,178.25 130.25,178.25 ; 129.25,179.25 130.25,178.25
5C: Q6.2 R77.1 | length 6.6
  Bottom Layer w1: Q6.2@144.5,175.75 149.94,175.75 R77.1@150.75,176.56
5D: D39.3 Q6.1 R48.1 | length 15.4
  Top Layer w1: v1@144.5,180.75 v1(144.5,184.75)
  Bottom Layer w1: D39.3@144.25,187.25 D39.3@144.419,187.419 ; Q6.1@144.5,178 Q6.1@144.5,178.25 ; v1(144.5,180.25) 144.5,179.25 ; v1(144.5,184.75) 144.419,184.831 D39.3@144.419,187.419 ; 146.25,178.25 145.5,178.25 ; R48.1@148.25,178.25 145.5,178.25 ; D39.3@144.419,187.419 D39.3@144.419,187.485 144.434,187.5 144.5,187.5 D39.3@144.419,187.419 ; Q6.1@144.5,178.25 144.5,179.25 ; Q6.1@144.5,178.25 145.5,178.25 ; 144.5,179.25 145.5,178.25
6C: Q7.2 R78.1 | length 6.8
  Bottom Layer w1: Q7.2@159.75,175.75 166.44,175.75 R78.1@166.5,175.81
6D: D40.3 Q7.1 R49.1 | length 15.6
  Top Layer w1: v1@159.5,180.25 159.687,180.437 v1(159.75,180.437) ; v1(159.75,180.437) v1(159.75,184.75)
  Bottom Layer w1: D40.3@159.659,187.485 159.735,187.485 159.5,187.25 D40.3@159.75,186.999 ; v1(159.75,184.75) D40.3@159.75,186.999 ; v1@159.75,180.5 v1(159.75,180.437) 159.75,179.344 ; 161,178.25 160.844,178.25 ; R49.1@163.75,178.25 160.844,178.25 ; 159.75,179.344 160.844,178.25 ; 159.75,179.344 Q7.1@159.75,178.25 160.844,178.25
7C: Q8.2 R79.1 | length 6.5
  Bottom Layer w1: Q8.2@175,175.75 R79.1@181.5,175.75
7D: D34.3 Q8.1 R71.1 | length 15.4
  Top Layer w1: v1@175,180.5 v1(175.125,180.5) 175.125,184.875 v1(175,185)
  Bottom Layer w1: D34.3@174.899,187.485 174.899,187.351 175,187.25 v1(175,185) ; v1(175.125,180.5) 175.125,179.5 ; 176.5,178.25 176.375,178.25 ; R71.1@179,178.25 176.375,178.25 ; 175.125,179.5 176.375,178.25 ; 175.125,179.5 175.125,178.375 Q8.1@175,178.25 176.375,178.25
8C: Q9.2 R80.1 | length 6.3
  Bottom Layer w1: Q9.2@190.25,175.75 R80.1@196.5,175.75
8D: D41.3 Q9.1 R72.1 | length 13.4
  Top Layer w1: D41.3@190,187.5 190.015,187.485 D41.3@190.142,187.485 ; v1(190.25,180.25) v1(190.25,184.75)
  Bottom Layer w1: D41.3@190.142,187.485 190.25,187.377 v1(190.25,184.75) ; Q9.1@190.25,178.25 191.25,178.25 ; Q9.1@190.25,178.92 190.25,179.5 191.25,178.5 191.25,178.25 ; R72.1@194,178.25 191.25,178.25
12V: C31.2 D7.2 D8.1 D31.2 D33.2 J1.1 K1.3 K2.3 P16.1 R69.1 R70.1 U17.8 U18.16 | length 449.8
  Top Layer w1: v1(57.25,170.25) v1(57.25,174.5) ; v1(60.25,148.75) v1(60.25,157.25)
  Bottom Layer w1: 16.05,198.5 16.05,198.45 ; J1.1@16.05,204.75 16.05,198.45 ; D8.1@16.48,193 16.48,195 ; v1(57.25,170.25) 57.25,162.25 ; v1(57.25,174.5) 49,174.5 48.168,175.332 48.168,181.082 42.25,187 35.25,187 34.25,188 34.25,192.75 ; v1(60.25,148.75) 60.25,77.25 ; v1(60.25,157.25) 58.5,157.25 57.25,158.5 57.25,159.5 ; U17.8@60.923,160.633 60.806,160.75 58.75,160.75 ; R70.1@113.096,60.25 R69.1@113.096,62.889 114.516,64.309 D33.2@114.516,65.889 D31.2@114.516,69.389 114.516,74.75 ; K2.3@132.286,51.389 136.036,51.389 136.536,51.889 136.536,68.139 136.01,68.665 133.977,68.665 ; K1.3@132.286,69.639 132.286,70.356 ; K1.3@132.324,68.665 133.977,68.665 ; 179.75,63.509 179.397,63.509 ; C31.2@180.834,63.415 180.74,63.509 179.397,63.509 ; 16.05,198.45 16.05,196.93 D7.2@16.48,196.5 ; 16.05,198.45 18,196.5 ; 16.48,195 D7.2@16.48,196.5 ; 16.48,195 16.5,195 18,196.5 ; D7.2@16.48,196.5 18,196.5 ; 18,196.5 29.5,196.5 31.75,194.25 32.75,194.25 ; 32.75,194.25 34.25,192.75 ; 32.75,194.25 P16.1@34.25,194.25 34.25,192.75 ; 57.25,159.5 58.5,160.75 ; 57.25,159.5 57.25,160.75 ; 57.25,160.75 57.25,162.25 ; 57.25,160.75 58.5,160.75 ; 57.25,162.25 58.75,160.75 ; 58.5,160.75 58.75,160.75 ; 59.165,76.165 60.25,77.25 ; 59.165,76.165 52.415,76.165 52.25,76 52.25,66 85.25,66 85.25,73.415 ; 59.165,76.165 61.335,76.165 ; 60.25,77.25 61.335,76.165 ; 61.335,76.165 85.25,76.165 ; 85.25,73.415 84.835,73 84.25,73 85.25,74 ; 85.25,73.415 88,76.165 ; 85.25,73.415 85.25,74 ; 85.25,74 87.25,76 87.25,76.165 ; 85.25,74 85.25,74.915 ; 85.25,74.915 86.5,76.165 ; 85.25,74.915 85.25,76.165 ; 85.25,76.165 86.5,76.165 ; 86.5,76.165 87.25,76.165 ; 87.25,76.165 88,76.165 ; 88,76.165 113.25,76.165 ; 113.25,76.165 114.727,76.165 ; 113.25,76.165 114.516,74.899 ; 114.516,74.75 115.931,76.165 ; 114.516,74.75 114.516,74.899 ; 114.516,74.899 114.516,75.954 114.727,76.165 ; 114.727,76.165 115.931,76.165 ; 115.931,76.165 131.124,76.165 ; 131.124,76.165 132.286,75.003 ; 131.124,76.165 133.415,76.165 ; 132.286,70.356 133.977,68.665 ; 132.286,70.356 132.286,75.003 ; 132.286,75.003 132.286,75.036 133.415,76.165 ; 133.415,76.165 176.081,76.165 177.906,74.34 177.906,65 ; 177.906,65 U18.16@177.906,63.509 179.397,63.509 ; 177.906,65 179.397,63.509
A: D34.7 D35.7 D36.7 D37.7 D38.7 D39.7 D40.7 D41.7 R55.2 | length 193.1
  Bottom Layer w1: R55.2@71.06,205.75 71.905,206.595 84.416,206.595 86,205.011 85.999,205.01 D35.7@85.999,203.485 85.999,201.501 86.75,200.75 89.75,200.75 90.5,201.5 90.5,205.75 91.345,206.595 100.405,206.595 101.239,205.761 D36.7@101.239,203.485 ; D36.7@101.249,203.485 101.249,201.501 102,200.75 105,200.75 105.5,201.25 105.5,205.5 106.595,206.595 115.655,206.595 116.489,205.761 D37.7@116.489,203.485 ; D37.7@116.499,203.485 116.499,201.501 117.25,200.75 120.25,200.75 120.75,201.25 120.75,205.5 121.845,206.595 130.905,206.595 131.739,205.761 D38.7@131.739,203.485 ; D38.7@131.749,203.485 131.749,201.501 132.5,200.75 135.5,200.75 136,201.25 136,205.5 137.095,206.595 146.155,206.595 146.989,205.761 D39.7@146.989,203.485 ; D39.7@146.999,203.485 146.999,201.501 147.75,200.75 150.75,200.75 151.25,201.25 151.25,205.5 152.345,206.595 161.405,206.595 162.239,205.761 D40.7@162.239,203.485 ; D40.7@162.249,203.485 162.249,201.501 163,200.75 166,200.75 166.5,201.25 166.5,205.5 167.595,206.595 176.655,206.595 177.489,205.761 D34.7@177.489,203.485 ; D34.7@177.499,203.485 177.499,201.501 178.25,200.75 181.25,200.75 181.75,201.25 181.75,205.5 182.845,206.595 192.155,206.595 192.739,206.011 D41.7@192.739,203.485
A0: P31.2 U15.1 | length 6.9
  Bottom Layer w0.5: P31.2@230.563,186.585 P31.2@230.665,186.585
  Bottom Layer w1: U15.1@224.5,185.92 225.165,186.585 P31.2@230.563,186.585 ; P31.2@230.665,186.585 P31.2@231.147,186.585
a1: P13.7 P14.7 P15.3 | length 10.7
  Bottom Layer w1: P13.7@16.121,162.536 P14.7@21.963,162.536 P15.3@26.789,162.536
a2: P13.8 P14.8 P15.4 | length 10.7
  Bottom Layer w1: P13.8@16.121,159.996 P14.8@21.963,159.996 P15.4@26.789,159.996
a3: P13.9 P14.9 P15.5 | length 10.7
  Bottom Layer w1: P13.9@16.121,157.456 P14.9@21.963,157.456 P15.5@26.789,157.456
a4: P13.10 P14.10 P15.6 | length 10.7
  Bottom Layer w1: P13.10@16.121,154.916 P14.10@21.963,154.916 P15.6@26.789,154.916
a5: P13.11 P14.11 P15.7 | length 10.7
  Bottom Layer w1: P13.11@16.121,152.376 P14.11@21.963,152.376 P15.7@26.789,152.376
a6: P13.12 P14.12 P15.8 | length 10.7
  Bottom Layer w1: P13.12@16.121,149.836 P14.12@21.963,149.836 P15.8@26.789,149.836
a7: P13.13 P14.13 P15.9 | length 10.7
  Bottom Layer w1: P13.13@16.121,147.296 P14.13@21.963,147.296 P15.9@26.789,147.296
a8: P13.14 P14.14 P15.10 | length 10.7
  Bottom Layer w1: P13.14@16.121,144.756 P14.14@21.963,144.756 P15.10@26.789,144.756
A11: P31.3 U15.2 | length 6.9
  Bottom Layer w1: U15.2@224.5,188.46 225.165,189.125 P31.3@231.147,189.125
A22: P31.4 U15.3 | length 6.9
  Bottom Layer w1: U15.3@224.5,191 224.75,191.25 230.732,191.25 P31.4@231.147,191.665
B: D34.6 D35.6 D36.6 D37.6 D38.6 D39.6 D40.6 D41.6 R56.2 | length 190.7
  Bottom Layer w1: R56.2@71.06,203 70.25,203 69.244,204.006 69.244,206.994 70.345,208.095 89.595,208.095 ; D35.6@88.539,203.485 88.539,207.039 89.595,208.095 ; D36.6@103.779,203.485 103.779,206.816 ; D36.6@103.789,203.485 103.789,206.826 ; 103.789,207.039 103.789,206.826 ; 119.029,208.066 119,208.095 ; D37.6@119.039,203.485 119.039,207.056 ; 119.039,208.066 119.039,207.134 ; 134.279,208.066 134.25,208.095 ; D38.6@134.289,203.485 134.289,207.056 ; 134.289,208.066 134.289,207.056 ; D39.6@149.529,203.485 149.529,207.066 ; D40.6@164.779,203.485 164.779,207 ; D34.6@180.029,203.485 180.029,207 ; D41.6@195.222,203.485 195.222,207.374 194.5,208.095 181.25,208.095 ; 89.595,208.095 102.5,208.095 ; 102.5,208.095 103.75,208.095 ; 102.5,208.095 103.779,206.816 ; 103.75,208.095 105,208.095 ; 103.75,208.095 103.779,208.066 103.779,206.816 ; 103.779,206.816 103.789,206.826 ; 103.789,206.826 105,208.037 105,208.095 ; 105,208.095 118,208.095 ; 118,208.095 119,208.095 ; 118,208.095 119.039,207.056 ; 119,208.095 120,208.095 ; 119.039,207.056 119.039,207.134 ; 119.039,207.134 120,208.095 ; 120,208.095 133.25,208.095 ; 133.25,208.095 134.25,208.095 ; 133.25,208.095 134.289,207.056 ; 134.25,208.095 135.328,208.095 ; 134.289,207.056 135.328,208.095 ; 135.328,208.095 148.5,208.095 ; 148.5,208.095 149.5,208.095 ; 148.5,208.095 149.529,207.066 ; 149.5,208.095 150.558,208.095 ; 149.5,208.095 149.529,208.066 149.529,207.066 ; 149.529,207.066 150.558,208.095 ; 150.558,208.095 163.75,208.095 ; 163.75,208.095 164.75,208.095 ; 163.75,208.095 163.75,208.029 164.779,207 ; 164.75,208.095 165.874,208.095 ; 164.75,208.095 164.779,208.066 164.779,207 ; 164.779,207 165.874,208.095 ; 165.874,208.095 179,208.095 ; 179,208.095 180,208.095 ; 179,208.095 179,208.029 180.029,207 ; 180,208.095 181.25,208.095 ; 180,208.095 180.029,208.066 180.029,207 ; 180.029,207 180.155,207 181.25,208.095
C: D34.4 D35.4 D36.4 D37.4 D38.4 D39.4 D40.4 D41.4 R57.2 | length 233.8
  Bottom Layer w0.5: 67.613,182.886 84.386,182.886 ; 90.361,185.25 92.476,183.135 97.653,183.135 97.657,183.139 99.843,183.139 99.847,183.135 100.635,183.135 101.239,183.739 101.239,184.989 101.25,185 ; 105.5,184.5 105.5,183.75 106.139,183.111 115.861,183.111 116.479,183.729 116.479,184.521 ; 120.75,184.75 120.75,183.5 121.139,183.111 131.111,183.111 131.739,183.739 131.739,184.739 131.75,184.75 ; 136,184.75 136,184 136.889,183.111 146.111,183.111 147,184 147,184.75 ; 151.25,184.5 151.25,183.75 151.889,183.111 161.611,183.111 162.239,183.739 162.239,185.011 162.199,185.051 ; 166.5,184.25 166.5,183.75 167,183.25 177,183.25 177.489,183.739 ; 181.75,184.25 181.75,183.75 182.389,183.111 192.111,183.111 192.739,183.739
  Bottom Layer w1: 67.613,182.886 66,184.5 66,199.5 67,200.5 R57.2@71.06,200.5 ; 84.386,182.886 85.999,184.499 D35.4@85.999,187.485 85.999,189.249 86.5,189.75 89.75,189.75 90.25,189.25 90.25,185.361 ; D36.4@101.239,187.485 101.25,187.474 101.25,185 ; D36.4@101.249,187.485 101.249,189.249 101.75,189.75 105,189.75 105.5,189.25 105.5,184.5 ; D37.4@116.479,187.485 116.479,184.521 116.5,184.5 ; D37.4@116.499,187.485 116.499,189.249 117,189.75 120.25,189.75 120.75,189.25 120.75,184.75 ; D38.4@131.719,187.485 131.75,187.454 131.75,184.75 ; D38.4@131.749,187.485 131.749,189.249 132.25,189.75 135.5,189.75 136,189.25 136,184.75 ; D39.4@146.959,187.485 147,187.444 147,184.75 ; D39.4@146.999,187.485 146.999,189.249 147.5,189.75 150.75,189.75 151.25,189.25 151.25,184.5 ; 162.199,185.051 D40.4@162.199,187.485 ; D40.4@162.249,187.485 162.249,189.249 162.75,189.75 166,189.75 166.5,189.25 166.5,184.25 ; 177.489,183.739 D34.4@177.489,187.485 ; D34.4@177.499,187.485 177.499,189.249 178,189.75 181.25,189.75 181.75,189.25 181.75,184.25 ; 192.739,183.739 D41.4@192.739,187.485
c1: P14.15 P15.11 | length 4.8
  Bottom Layer w1: P14.15@21.963,142.216 P15.11@26.789,142.216